# EAGLE board MCU board ATmega328p v2.3 (EAGLE 9.2.1)
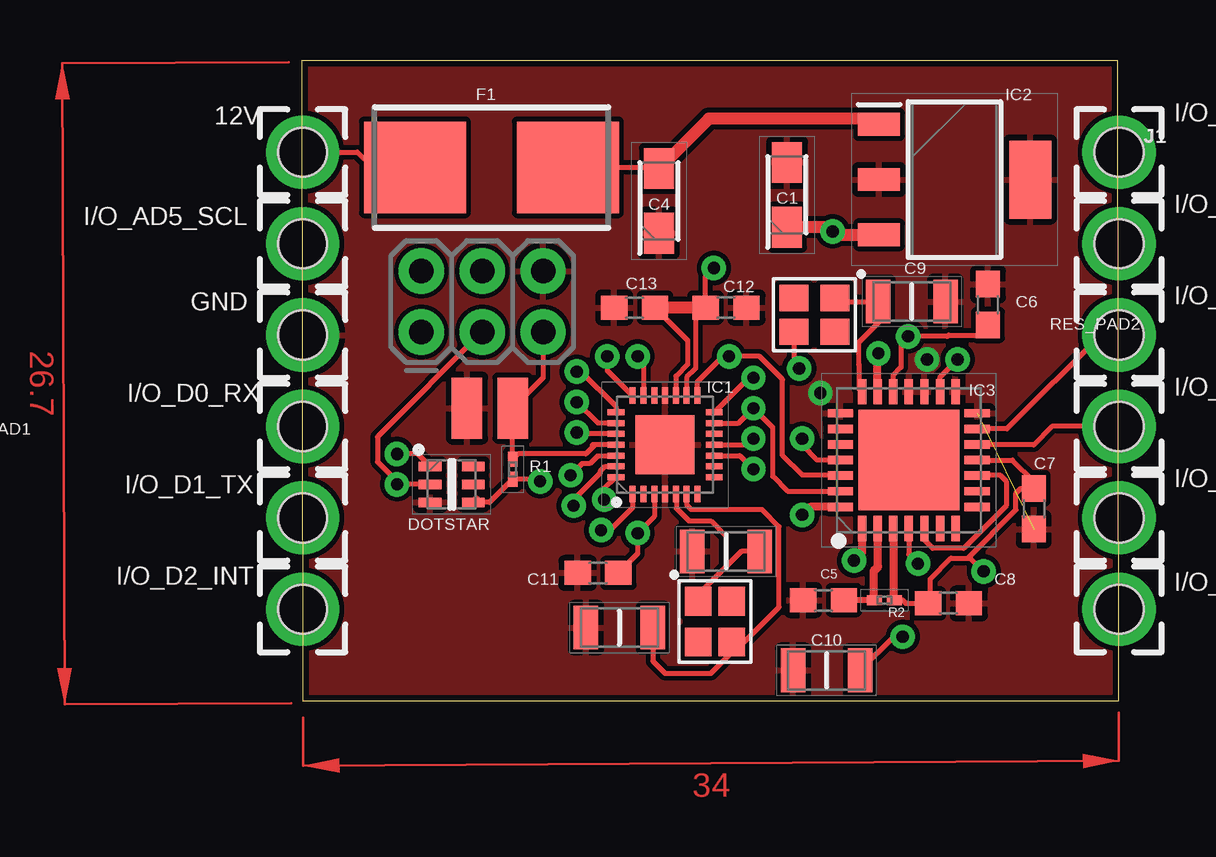
[diagram p0: board, top side]
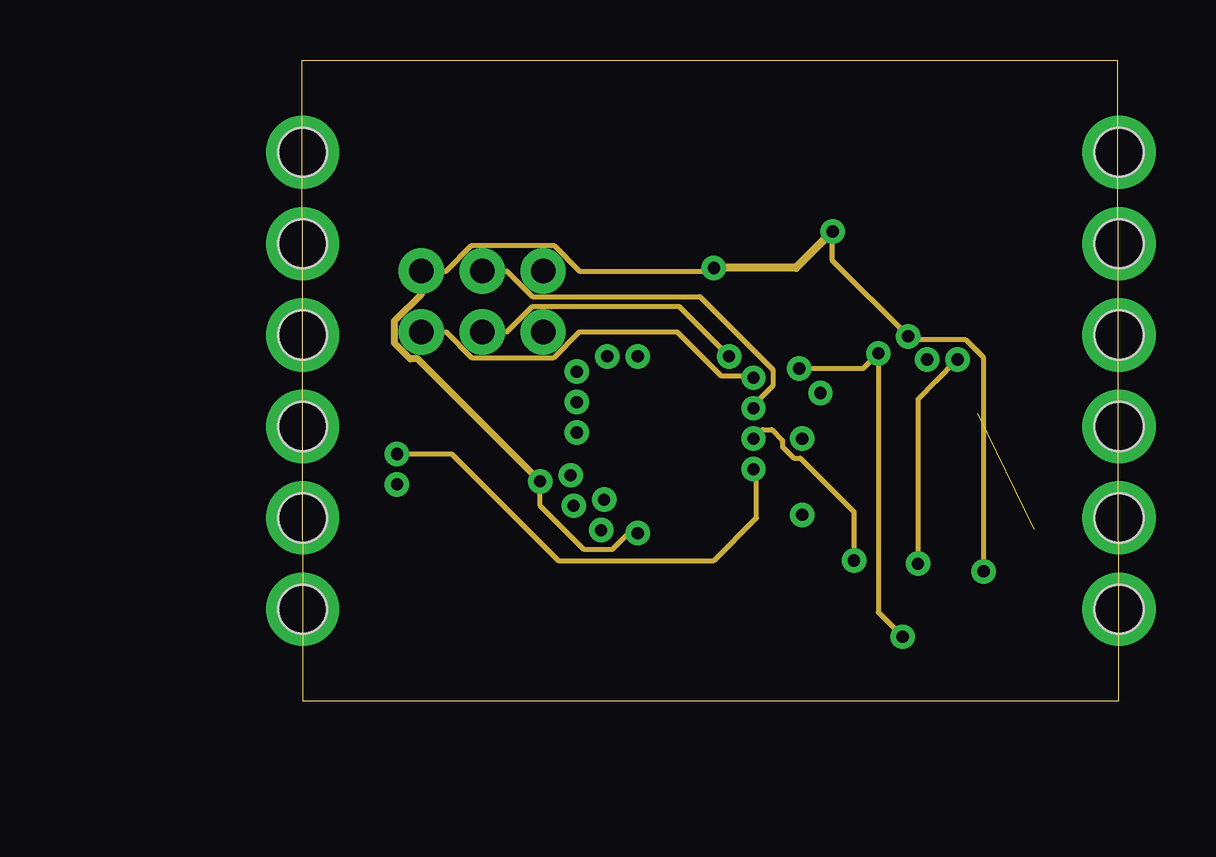
[diagram p1: board, inner layer Route2]
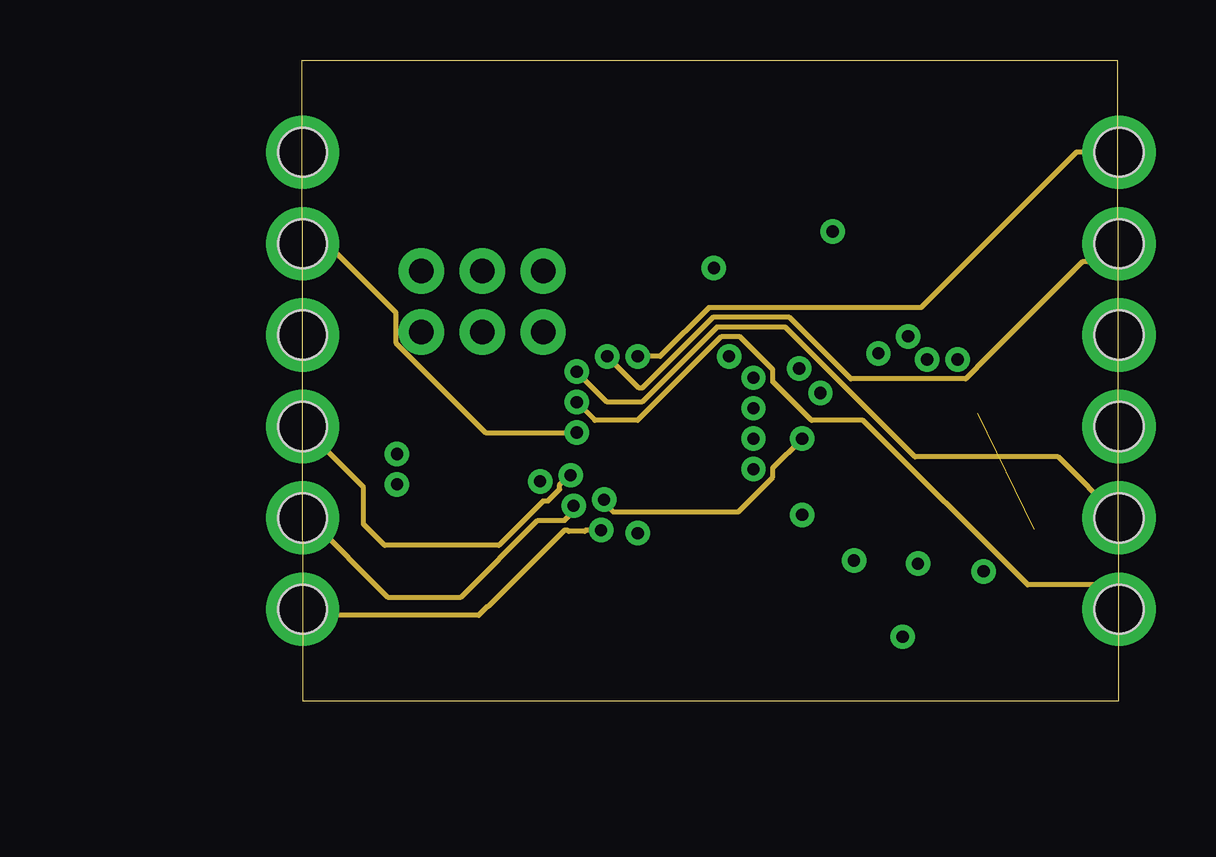
[diagram p2: board, inner layer Route3]
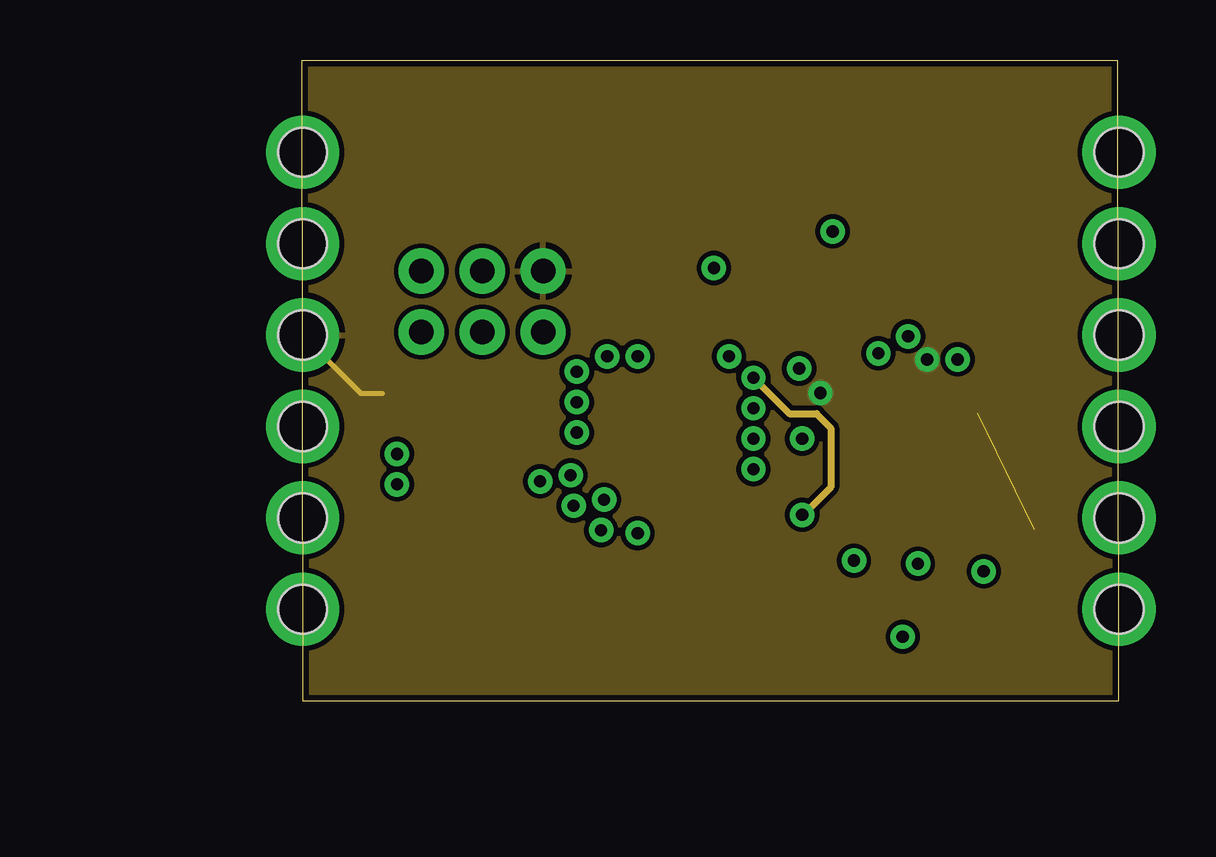
[diagram p3: board, inner layer Route4]

Size 34.04 x 26.66 mm. Coordinates in mm from the lower left corner, seen from the top.
Outline: 0.03,0 34.04,0 34.02,26.66 0,26.66 0.03,0
Copper layers (1*2*3*4): Top 0.035mm / dielectric 0.432mm / Route2 0.017mm / dielectric 0.432mm / Route3 0.017mm / dielectric 0.432mm / Route4 0.035mm
Design rules "default *": minimum track width 8mil, minimum drill 20mil, track to track 8mil, track to pad 8mil, pad to pad 8mil, via to via 8mil, smd to smd 8mil, copper to edge 10mil, drill to drill 8mil, minimum pad ring 12mil, minimum via ring 10mil, stop-mask expansion 4mil, vias tented up to drill 25mil, thermal gap 10mil

## Footprints (pad centres in the part's own frame; a part is rotated, then mirrored left to right if it is on the bottom)
2,54/2,0(HALFHOLE)H+V = drill 2.032 pad 3.048: P$1 0,0 | hole 2.032: 0,0
CAPPM3216X180N = smd 1.7 x 1.25: 1 -1.35,0; 2 1.35,0
CAPC3216X229N = smd 1.02 x 1.82: 1 -1.4,0; 2 1.4,0
C0603 = smd 1.1 x 1: 1 -0.85,0; 2 0.85,0
SON75P200X200X100-6N = smd 0.95 x 0.4: 1 -0.9,0.75; 2 -0.9,0; 3 -0.9,-0.75; 4 0.9,-0.75; 5 0.9,0; 6 0.9,0.75
0154001.DRT = smd 4.242 x 3.81: 1 -3.188,0; 2 3.188,0
QFN45P400X400X100-29N = smd 0.7 x 0.25: 1 -2.05,1.35; 2 -2.05,0.9; 3 -2.05,0.45; 4 -2.05,0; 5 -2.05,-0.45; 6 -2.05,-0.9; 7 -2.05,-1.35; 15 2.05,-1.35; 16 2.05,-0.9; 17 2.05,-0.45; 18 2.05,0; 19 2.05,0.45; 20 2.05,0.9; 21 2.05,1.35 | smd 0.25 x 0.7: 8 -1.35,-2.05; 9 -0.9,-2.05; 10 -0.45,-2.05; 11 0,-2.05; 12 0.45,-2.05; 13 0.9,-2.05; 14 1.35,-2.05; 22 1.35,2.05; 23 0.9,2.05; 24 0.45,2.05; 25 0,2.05; 26 -0.45,2.05; 27 -0.9,2.05; 28 -1.35,2.05 | smd 2.45 x 2.45: 29 0,0
SOT230P700X170-4N = smd 1.75 x 0.95: 1 -3.15,2.3; 2 -3.15,0; 3 -3.15,-2.3 | smd 1.75 x 3.25: 4 3.15,0
QFN65P600X600X100-29N = smd 1.05 x 0.35: 1 -2.85,1.95; 2 -2.85,1.3; 3 -2.85,0.65; 4 -2.85,0; 5 -2.85,-0.65; 6 -2.85,-1.3; 7 -2.85,-1.95; 15 2.85,-1.95; 16 2.85,-1.3; 17 2.85,-0.65; 18 2.85,0; 19 2.85,0.65; 20 2.85,1.3; 21 2.85,1.95 | smd 0.35 x 1.05: 8 -1.95,-2.85; 9 -1.3,-2.85; 10 -0.65,-2.85; 11 0,-2.85; 12 0.65,-2.85; 13 1.3,-2.85; 14 1.95,-2.85; 22 1.95,2.85; 23 1.3,2.85; 24 0.65,2.85; 25 0,2.85; 26 -0.65,2.85; 27 -1.3,2.85; 28 -1.95,2.85 | smd 4.2 x 4.2: 29 0,0
2X3-NS = drill 1.016 pad 1.88: 1 -2.54,-1.27; 2 -2.54,1.27; 3 0,-1.27; 4 0,1.27; 5 2.54,-1.27; 6 2.54,1.27
RESC0603X28N = smd 0.625 x 0.4: 1 -0.412,0; 2 0.412,0
SMD1,27-2,54 = smd 1.27 x 2.54: 1 0,0
FA-20H = smd 1.2 x 1.1: 1 0.8,0.75; 2 2.5,0.75; 3 2.5,2.15; 4 0.8,2.15

## Placement (x,y rotation side)
12V  [2,54/2,0(HALFHOLE)H+V]  0.03,22.86 90 top
C1  10uF  [CAPPM3216X180N]  20.22,21.08 90 top
C2  22pF  [CAPC3216X229N]  17.68,6.22 0 top
C3  22pF  [CAPC3216X229N]  13.23,3.05 0 top
C4  10uF  [CAPPM3216X180N]  14.89,20.83 90 top
C5  0.1uF  [C0603]  21.74,4.19 180 top
C6  0.1uF  [C0603]  28.6,16.51 90 top
C7  0.1uF  [C0603]  30.51,8 270 top
C8  0.1uF  [C0603]  26.95,4.06 0 top
C9  22pF  [CAPC3216X229N]  25.43,16.64 180 top
C10  22pF  [CAPC3216X229N]  21.87,1.27 0 top
C11  0.1uF  [C0603]  12.35,5.33 180 top
C12  0.1uF  [C0603]  17.68,16.38 0 top
C13  0.1uF  [C0603]  13.87,16.38 180 top
DOTSTAR  COM-14608  [SON75P200X200X100-6N]  6.25,9.02 0 top
F1  0154005.DRT  [0154001.DRT]  7.9,22.23 0 top
GND  [2,54/2,0(HALFHOLE)H+V]  0.03,15.24 0 top
I/O_AD1  [2,54/2,0(HALFHOLE)H+V]  34.06,22.86 0 top
I/O_AD2  [2,54/2,0(HALFHOLE)H+V]  34.06,19.05 0 top
I/O_AD3  [2,54/2,0(HALFHOLE)H+V]  34.06,7.62 0 top
I/O_AD4_SDA  [2,54/2,0(HALFHOLE)H+V]  34.06,3.81 0 top
I/O_AD5_SCL  [2,54/2,0(HALFHOLE)H+V]  0.03,19.05 0 top
I/O_CANH  [2,54/2,0(HALFHOLE)H+V]  34.06,15.24 0 top
I/O_CANL  [2,54/2,0(HALFHOLE)H+V]  34.06,11.43 0 top
I/O_D0_RX  [2,54/2,0(HALFHOLE)H+V]  0.03,11.43 0 top
I/O_D1_TX  [2,54/2,0(HALFHOLE)H+V]  0.03,7.62 0 top
I/O_D2_INT  [2,54/2,0(HALFHOLE)H+V]  0.03,3.81 0 top
IC1  ATMEGA328P-MMH  [QFN45P400X400X100-29N]  15.14,10.67 90 top
IC2  MIC5239-5.0YS_TR  [SOT230P700X170-4N]  27.2,21.72 0 top
IC3  MCP25625-E_ML  [QFN65P600X600X100-29N]  25.3,10.03 90 top
J1  AVR_SPI_PROG_3X2NS  [2X3-NS]  7.52,16.64 0 top
R1  10KΩ  [RESC0603X28N]  8.79,9.65 270 top
R2  10KΩ  [RESC0603X28N]  24.28,4.19 0 top
RES_PAD1  [SMD1,27-2,54]  8.79,12.19 180 top
RES_PAD2  [SMD1,27-2,54]  6.88,12.19 0 top
U$1  FA-20H  [FA-20H]  23.01,17.53 180 top
U$2  FA-20H  [FA-20H]  15.78,4.95 270 top

## Library data of the parts
12V GND I/O_AD1-I/O_AD3 I/O_AD4_SDA I/O_AD5_SCL I/O_CANH I/O_CANL I/O_D0_RX I/O_D1_TX I/O_D2_INT = wirepad_edit
C1 C4 = T491A106K016AT; ARROW_PART_NUMBER: T491A106K016AT; ARROW_PRICE-STOCK: https://www.arrow.com/en/products/t491a106k016at/kemet-corporation; DESCRIPTION: Capacitor Tantalum T491 Case A 16V 10uF Kemet ????10% 10????F 16 V dc SMD Tantalum Electrolytic Capacitor, A ESR 7???? +125????C T491; HEIGHT: 1.8mm; MANUFACTURER_NAME: Kemet; MANUFACTURER_PART_NUMBER: T491A106K016AT; RS_PART_NUMBER: 1696687; RS_PRICE-STOCK: http://uk.rs-online.com/web/p/products/1696687
C2 C3 C9 C10 = 12066D106KAT2A; ALLIED_NUMBER: 70002294; ALLIED_PRICE-STOCK: http://www.alliedelec.com/avx-12066d106kat2a/70002294/; ARROW_PART_NUMBER: 12066D106KAT2A; ARROW_PRICE-STOCK: http://uk.rs-online.com/web/p/products/1356756; DESCRIPTION: AVX 10uF /-10% 6.3 V dc X5R Dielectric SMD Ceramic Multilayer Capacitor 1206; HEIGHT: 2.29mm; MANUFACTURER_NAME: AVX; MANUFACTURER_PART_NUMBER: 12066D106KAT2A; RS_PART_NUMBER: 1356756; RS_PRICE-STOCK: http://uk.rs-online.com/web/p/products/1356756
C5-C8 C11-C13 = eagle-ltspice; SPICEMODEL: NONE; SPICEPREFIX: C
DOTSTAR = APA102–2020; ARROW_PART_NUMBER: COM-14608; DESCRIPTION: SparkFun Accessories SMD LED - RGB APA102-2020; HEIGHT: 1mm; MANUFACTURER_NAME: SparkFun; MANUFACTURER_PART_NUMBER: COM-14608
F1 = 0154005(Fuseholder)DRT; ALLIED_NUMBER: 70184875; ALLIED_PRICE-STOCK: https://www.alliedelec.com/littelfuse-0154005-drt/70184875/; ARROW_PART_NUMBER: 0154005.DRT; ARROW_PRICE-STOCK: https://www.arrow.com/en/products/0154005.drt/littelfuse; DESCRIPTION: Littelfuse 5A T Surface Mount Fuse, 125V ac/dc; HEIGHT: mm; MANUFACTURER_NAME: LITTELFUSE; MANUFACTURER_PART_NUMBER: 0154005.DRT; RS_PART_NUMBER: 2196260P; RS_PRICE-STOCK: http://uk.rs-online.com/web/p/products/2196260P
IC1 = ATMEGA328P-MMH; ARROW_PART_NUMBER: ATMEGA328P-MMH; ARROW_PRICE-STOCK: https://www.arrow.com/en/products/atmega328p-mmh/microchip-technology; DESCRIPTION: Atmel ATMEGA328P-MMH, 8bit AVR Microcontroller, 20MHz, 32 kB Flash, 28-Pin QFN; HEIGHT: 1mm; MANUFACTURER_NAME: Microchip; MANUFACTURER_PART_NUMBER: ATMEGA328P-MMH; RS_PART_NUMBER: 1310272P; RS_PRICE-STOCK: http://uk.rs-online.com/web/p/products/1310272P
IC2 = MIC5239-5.0YS_TR; ARROW_PART_NUMBER: MIC5239-5.0YS TR; ARROW_PRICE-STOCK: http://uk.rs-online.com/web/p/products/7275535P; DESCRIPTION: LDO Regulator Pos 5V 0.5A Micrel MIC5239-5.0YS TR, LDO Voltage Regulator, 500mA, 5 V 1%, 2.3 30 Vin, 3 + Tab-Pin SOT-223; HEIGHT: 1.7mm; MANUFACTURER_NAME: Micrel; MANUFACTURER_PART_NUMBER: MIC5239-5.0YS TR; RS_PART_NUMBER: 7275535P; RS_PRICE-STOCK: http://uk.rs-online.com/web/p/products/7275535P
IC3 = MCP25625-E_ML; ALLIED_NUMBER: 70431541; ALLIED_PRICE-STOCK: http://www.alliedelec.com/microchip-technology-inc-mcp25625-e-ml/70431541/; ARROW_PART_NUMBER: MCP25625-E/ML; ARROW_PRICE-STOCK: https://www.arrow.com/en/products/mcp25625-eml/microchip-technology; DESCRIPTION: CAN Controller with Transceiver QFN28 Microchip MCP25625-E/ML, CAN Controller, 28-Pin QFN; HEIGHT: 1mm; MANUFACTURER_NAME: Microchip; MANUFACTURER_PART_NUMBER: MCP25625-E/ML; RS_PART_NUMBER: 1654104; RS_PRICE-STOCK: http://uk.rs-online.com/web/p/products/1654104
J1 = SparkFun-Connectors
R1 R2 = CPF0201D10KC1; ARROW_PART_NUMBER: CPF0201D10KC1; ARROW_PRICE-STOCK: http://uk.rs-online.com/web/p/products/7549833; DESCRIPTION: TE Connectivity CPF Series Thin Film Surface Mount Fixed Resistor 0201 Case 10k 0.5% 0.031W 50ppm/C; HEIGHT: 0.28mm; MANUFACTURER_NAME: TE Connectivity; MANUFACTURER_PART_NUMBER: CPF0201D10KC1; RS_PART_NUMBER: 7549833; RS_PRICE-STOCK: http://uk.rs-online.com/web/p/products/7549833
RES_PAD1 RES_PAD2 = wirepad
U$1 U$2 = FA-20H 16.0000MF20X-B

## Nets
5V: C1.1 C6.1 C7.1 C8.1 C11.1 C12.1 C13.1 DOTSTAR.4 IC1.3 IC1.16 IC1.17 IC2.3 IC3.3 IC3.11 IC3.19 J1.2 R1.2 R2.2
12V_FUSED: C4.2 F1.2 IC2.1
12V_UNFUSED: 12V.P$1 F1.1
CAN_CS: IC1.11 IC3.1
CAN_INIT: IC1.28 IC3.25
CAN_OSC1: C9.2 IC3.21 U$1.1
CAN_OSC2: C10.2 IC3.20 U$1.3
CANH: I/O_CANH.P$1 IC3.13
CANL: I/O_CANL.P$1 IC3.12
DOTS_CS: DOTSTAR.1 IC1.10
GND: C1.2 C2.1 C3.1 C4.1 C5.2 C6.2 C7.2 C8.2 C9.1 C10.1 C11.2 C12.2 C13.2 DOTSTAR.3 GND.P$1 IC1.4 IC1.18 IC1.29 IC2.2 IC2.4 IC3.14 IC3.15 IC3.17 IC3.18 IC3.22 J1.6 RES_PAD2.1
I/O_AD1: I/O_AD1.P$1 IC1.20
I/O_AD2: I/O_AD2.P$1 IC1.21
I/O_AD3: I/O_AD3.P$1 IC1.22
I/O_AD4_SCL: I/O_AD4_SDA.P$1 IC1.23
I/O_AD5_SCL: I/O_AD5_SCL.P$1 IC1.24
I/O_D0_RX: I/O_D0_RX.P$1 IC1.26
I/O_D1_TX: I/O_D1_TX.P$1 IC1.27
I/O_D2_INT: I/O_D2_INT.P$1 IC1.1
MCP_RESET: C5.1 IC3.2 R2.1
MCU_OSC1: C2.2 IC1.5 U$2.1
MCU_OSC2: C3.2 IC1.6 U$2.3
MISO: IC1.14 IC3.28 J1.1
MOSI: IC1.13 IC3.27 J1.4
RESET_MCU: IC1.25 J1.5 R1.1 RES_PAD1.1
RXCAN: IC3.5 IC3.10
SCK: DOTSTAR.2 IC1.15 IC3.26 J1.3
TXCAN: IC3.4 IC3.16

## Tracks (layer width: path | path; a pad name or v marks a point on that pad's centre or on a via)
5V  (via drill 0.51 layers 1-4)
  Top 0.203: IC1.17 15.59,13.53 16.08,14.01 16.08,15.02 14.8,16.3 C13.1 | IC1.16 16.04,13.47 16.41,13.84 16.41,15.96 C12.1 16.83,17.69 v17.17,18.03 | IC3.19 24.65,13.57 24.97,13.89 24.97,14.89 v25.27,15.19 26.9,15.19 26.95,15.24 28.18,15.24 C6.1 | IC3.11 29.62,10.03 30.51,9.14 C7.1 29.97,8.85 29.77,8.65 29.77,7.96 27.75,5.94 | R2.2 25.05,4.19 25.17,4.06 C8.1 26.19,4.15 26.19,5.07 27.06,5.94 27.75,5.94 | IC1.3 14.69,7.68 v14,6.99 14,6.13 C11.1 | v9.93,9.14 9.84,9.24 R1.2 7.82,8.27 DOTSTAR.4 | 27.75,5.94 27.87,5.94 v28.42,5.39
  Top 0.33: IC3.3 24.65,4.24 R2.2 | DOTSTAR.4 7.27,8.38
  Top 0.508: C1.1 21.95,19.73 v22.12,19.56 22.27,19.42 IC2.3 | C12.1 14.89,16.38 14.8,16.3
  Route2 0.203: v22.12,19.56 22.12,18.33 v25.27,15.19 25.42,15.04 27.67,15.04 28.42,14.28 v28.42,5.39 | v17.17,18.03 17.04,17.91 11.57,17.91 10.5,18.97 7.08,18.97 6.01,17.91 J1.2 | v14,6.99 13.62,6.99 12.94,6.3 11.76,6.3 9.93,8.13 v9.93,9.14
  Route2 0.3: J1.2 4.98,16.94 3.87,15.83 3.87,14.9 4.52,14.25 4.83,14.25 v9.93,9.14
  Route2 0.33: v22.12,19.56 20.6,18.03 v17.17,18.03
12V_FUSED
  Top 0.203: C4.2 14.84,22.23 F1.2
  Top 0.508: IC2.1 23.81,24.26 16.96,24.26 C4.2
12V_UNFUSED
  Top 0.203: 12V.P$1 2.31,22.86 2.95,22.23 F1.1
CAN_CS  (via drill 0.51 layers 1-4)
  Top 0.203: IC1.11 18.57,10.67 v18.82,10.92
  Top 0.33: IC3.1 23.35,6.18 v23.01,5.84
  Route2 0.203: v18.82,10.92 19.2,11.3 19.58,11.3 20.04,10.85 20.04,10.59 20.52,10.11 20.78,10.11 23.01,7.87 v23.01,5.84
CAN_INIT  (via drill 0.51 layers 1-4)
  Top 0.203: IC3.25 21.49,10.03 20.85,10.67 v20.85,10.92 | IC1.28 12.6,8.83 v12.6,8.38
  Route3 0.203: v12.6,8.38 12.6,8.26 12.98,7.87 18.19,7.87 19.64,9.31 19.64,9.7 v20.85,10.92
CAN_OSC1
  Top 0.203: IC3.21 23.22,13.01 23.22,14.01 23.22,14.94 24.03,15.75 C9.2 | C9.2 | U$1.1 22.36,16.63 C9.2
CAN_OSC2  (via drill 0.51 layers 1-4)
  Top 0.203: U$1.3 20.51,14.06 v20.73,13.84 | v25.05,2.67 24.67,2.67 C10.2
  Top 0.33: IC3.20 24,14.45 v24.03,14.48
  Route2 0.203: v20.73,13.84 23.39,13.84 v24.03,14.48 24.03,3.68 v25.05,2.67
CANH
  Top 0.203: I/O_CANH.P$1 33.3,15.24 29.39,11.33 IC3.13
CANL
  Top 0.203: IC3.12 28.16,10.67 30.51,10.67 31.27,11.43 I/O_CANL.P$1
DOTS_CS  (via drill 0.51 layers 1-4)
  Top 0.203: IC1.10 18.26,10.22 v18.82,9.65 | DOTSTAR.1 4.83,10.29 v3.96,10.29
  Route2 0.203: v3.96,10.29 6.25,10.29 10.7,5.84 17.17,5.84 18.95,7.62 18.95,9.53 v18.82,9.65
GND  (via drill 0.51 layers 1-4)  (1 unrouted)
  Top 0.203: 25.93,12.88 IC3.17 | 20.98,4.11 C5.2 | C9.1 27.02,16.83 | C13.2 12.85,16.38 | 16.16,6.22 C2.1
  Route4 0.203: 3.35,12.8 2.47,12.8 GND.P$1
  other vias: 26.06,14.22 21.62,12.83
  pour Route4: 34.75,27.54 34.75,-0.6 0.15,-0.6 -0.45,0 -0.45,26.98
  pour Top: -0.65,27.5 33.95,27.5 34.95,26.5 34.95,0.2 33.25,-1.5 -0.75,-1.5 -0.75,27.4
I/O_AD1  (via drill 0.51 layers 1-4)
  Top 0.203: IC1.20 14.24,14.11 v14,14.35
  Route3 0.203: I/O_AD1.P$1 32.29,22.86 25.81,16.38 16.96,16.38 14.93,14.35 v14,14.35
I/O_AD2  (via drill 0.51 layers 1-4)
  Top 0.203: IC1.21 12.73,13.78 v12.73,14.35
  Route3 0.203: I/O_AD2.P$1 33.3,18.29 32.54,18.29 28.14,13.89 27.67,13.41 22.88,13.41 20.32,15.98 17.13,15.98 14.18,13.02 14.05,13.02 v12.73,14.35
I/O_AD3  (via drill 0.51 layers 1-4)
  Top 0.203: IC1.22 13.09,12.27 11.65,13.72 v11.46,13.72
  Route3 0.203: I/O_AD3.P$1 31.52,10.16 25.56,10.16 20.15,15.57 17.3,15.57 14.18,12.45 12.73,12.45 v11.46,13.72
I/O_AD4_SCL  (via drill 0.51 layers 1-4)
  Top 0.203: IC1.23 12.34,11.57 v11.46,12.45
  Route3 0.203: I/O_AD4_SDA.P$1 33.05,4.83 30.25,4.83 23.39,11.68 21.24,11.68 19.64,13.29 19.64,13.8 18.27,15.16 17.47,15.16 13.99,11.68 12.22,11.68 v11.46,12.45
I/O_AD5_SCL  (via drill 0.51 layers 1-4)
  Top 0.203: IC1.24 11.52,11.12 v11.46,11.18
  Route3 0.203: I/O_AD5_SCL.P$1 1.04,19.05 3.91,16.18 3.91,14.93 7.66,11.18 v11.46,11.18
I/O_D0_RX  (via drill 0.51 layers 1-4)
  Top 0.203: IC1.26 13.07,10.2 12.32,10.2 12.01,9.88 11.69,9.88 v11.2,9.4
  Route3 0.203: v11.2,9.4 11.14,9.4 10.75,9.01 10.75,8.81 10.27,8.33 10.07,8.33 8.21,6.48 3.46,6.48 2.57,7.37 2.57,8.89 I/O_D0_RX.P$1
I/O_D1_TX  (via drill 0.51 layers 1-4)
  Top 0.203: IC1.27 13.07,9.75 12.61,9.75 12.44,9.57 12.44,9.48 11.33,8.38 v11.33,8.13
  Route3 0.203: v11.33,8.13 11.33,7.9 10.95,7.52 9.83,7.52 6.63,4.32 3.58,4.32 0.28,7.62 I/O_D1_TX.P$1
I/O_D2_INT  (via drill 0.51 layers 1-4)
  Top 0.203: IC1.1 13.79,8.05 12.85,7.11 v12.47,7.11
  Route3 0.203: v12.47,7.11 11.84,7.11 11.79,7.06 11.12,7.06 11.07,7.11 10.95,7.11 7.77,3.94 7.75,3.94 7.37,3.56 0.28,3.56 I/O_D2_INT.P$1
MCP_RESET
  Top 0.254: R2.1 C5.1
  Top 0.33: IC3.2 24,5.62 24.03,5.59 23.9,5.46 23.87,5.46 23.82,5.41 23.82,4.24 R2.1
MCU_OSC1
  Top 0.203: U$2.1 16.41,4.27 16.41,4.32 17.68,5.59 | IC1.5 15.61,8.6 15.61,8.02 16.13,7.49 17.04,7.49 17.68,6.86 17.68,5.59 | C2.2 18.31,6.22 17.68,5.59
MCU_OSC2
  Top 0.203: IC1.6 16.06,8.6 16.06,8.14 16.24,7.96 19.19,7.96 19.89,7.26 19.89,3.91 18.44,2.45 U$2.3 17.92,2.02 17.04,1.14 15.14,1.14 14.63,1.65 C3.2
MISO  (via drill 0.51 layers 1-4)
  Top 0.203: IC1.14 18.63,13.46 v18.82,13.46
  Top 0.33: IC3.28 21.19,8.08 v20.85,7.75
  Route2 0.203: J1.1 6.01,15.37 7.08,14.3 10.5,14.3 11.57,15.37 15.64,15.37 17.47,13.54 18.75,13.54 v18.82,13.46
  Route4 0.3: v18.82,13.46 20.32,11.97 21.45,11.97 22.05,11.37 22.05,8.9 20.9,7.75 v20.85,7.75
MOSI  (via drill 0.51 layers 1-4)
  Top 0.203: IC3.27 20.25,8.73 19.64,9.35 19.64,11.38 v18.82,12.19 18.2,11.57 IC1.13
  Route2 0.203: J1.4 8.55,17.91 9.62,16.84 16.59,16.84 19.64,13.8 19.64,13.12 18.82,12.31 v18.82,12.19
RESET_MCU
  Top 0.203: IC1.25 12.22,10.67 | 12.22,10.67 12.1,10.67 | J1.5 10.06,13.46 RES_PAD1.1 R1.1 9.01,10.29 11.84,10.29 12.22,10.67
RXCAN
  Top 0.203: IC3.10 28.16,9.4 29.11,9.4 29.36,9.14 29.36,8.13 27.59,6.35 26.3,6.35 25.95,6.7 IC3.5
SCK  (via drill 0.51 layers 1-4)
  Top 0.203: IC3.26 22.43,9.4 20.85,9.4 20.04,10.21 20.04,13.39 19.08,14.35 v17.81,14.35 17.55,14.35 16.49,13.29 IC1.15 | DOTSTAR.2 v3.96,9.02 3.96,9.14 3.15,9.95 3.15,11 J1.3
  Route2 0.203: J1.3 8.55,15.37 9.62,16.43 15.72,16.43 v17.81,14.35
TXCAN  (via drill 0.51 layers 1-4)
  Top 0.203: IC3.16 26.6,13.49 v27.33,14.22 | IC3.4 25.3,6.1 v25.68,5.71
  Route2 0.203: v25.68,5.71 25.68,12.57 26.39,13.28 26.4,13.28 26.88,13.76 26.88,13.77 v27.33,14.22
(copper drawn outside any net)
  shapes: Top area x2